# Altium PCB Vertical.PcbDoc
Units mm, origin at the board's own origin, x right, y up, seen from the top; angles counter-clockwise.
Board outline 53.95 x 47.07 mm, 2 copper layers (Top Layer, Bottom Layer), stack 1.58 mm thick; 36 components, 9 nets, 69 pads, 45 vias.
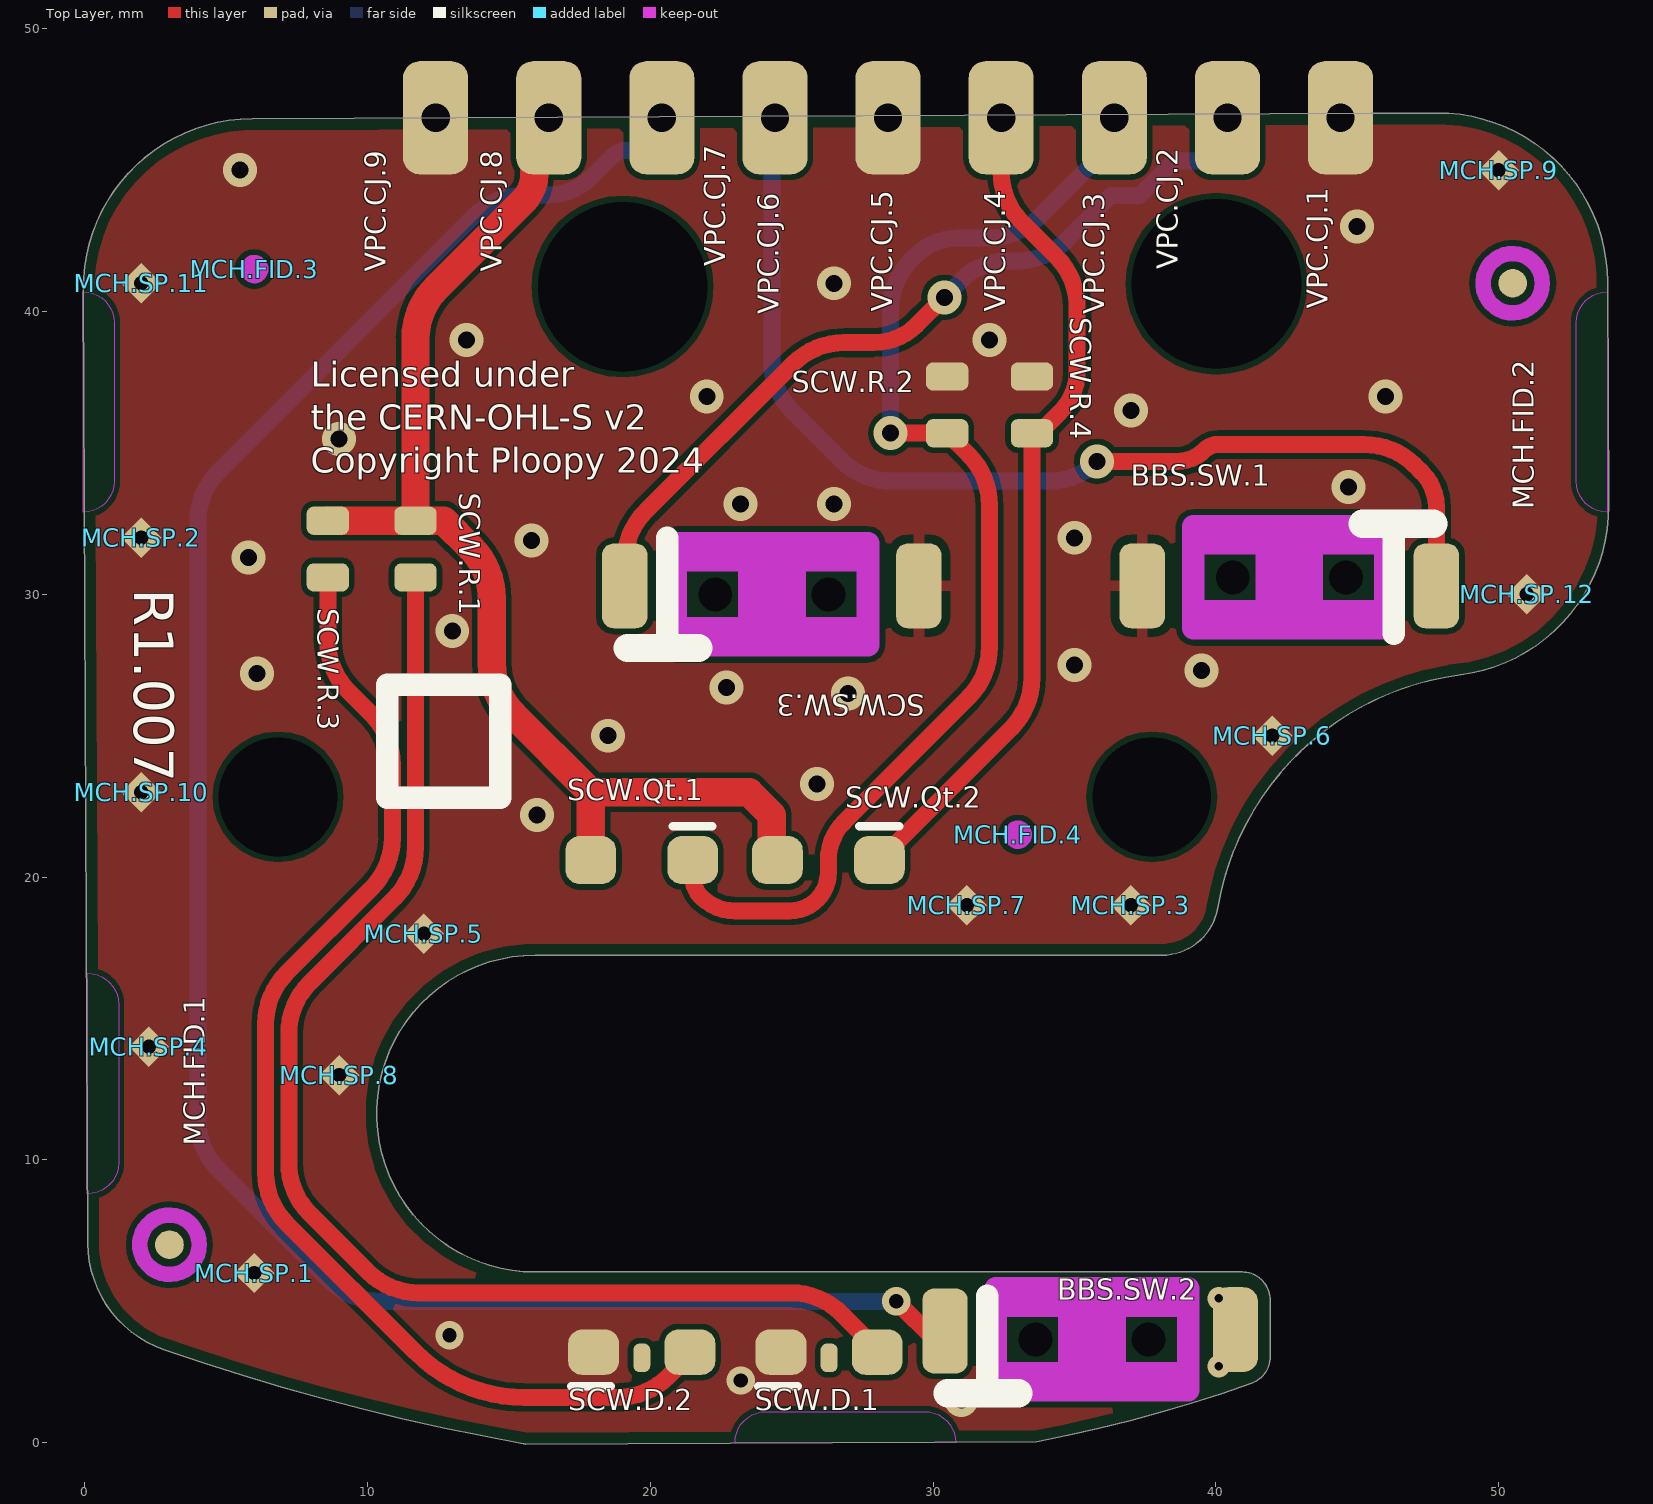
[diagram p0: Top Layer view]
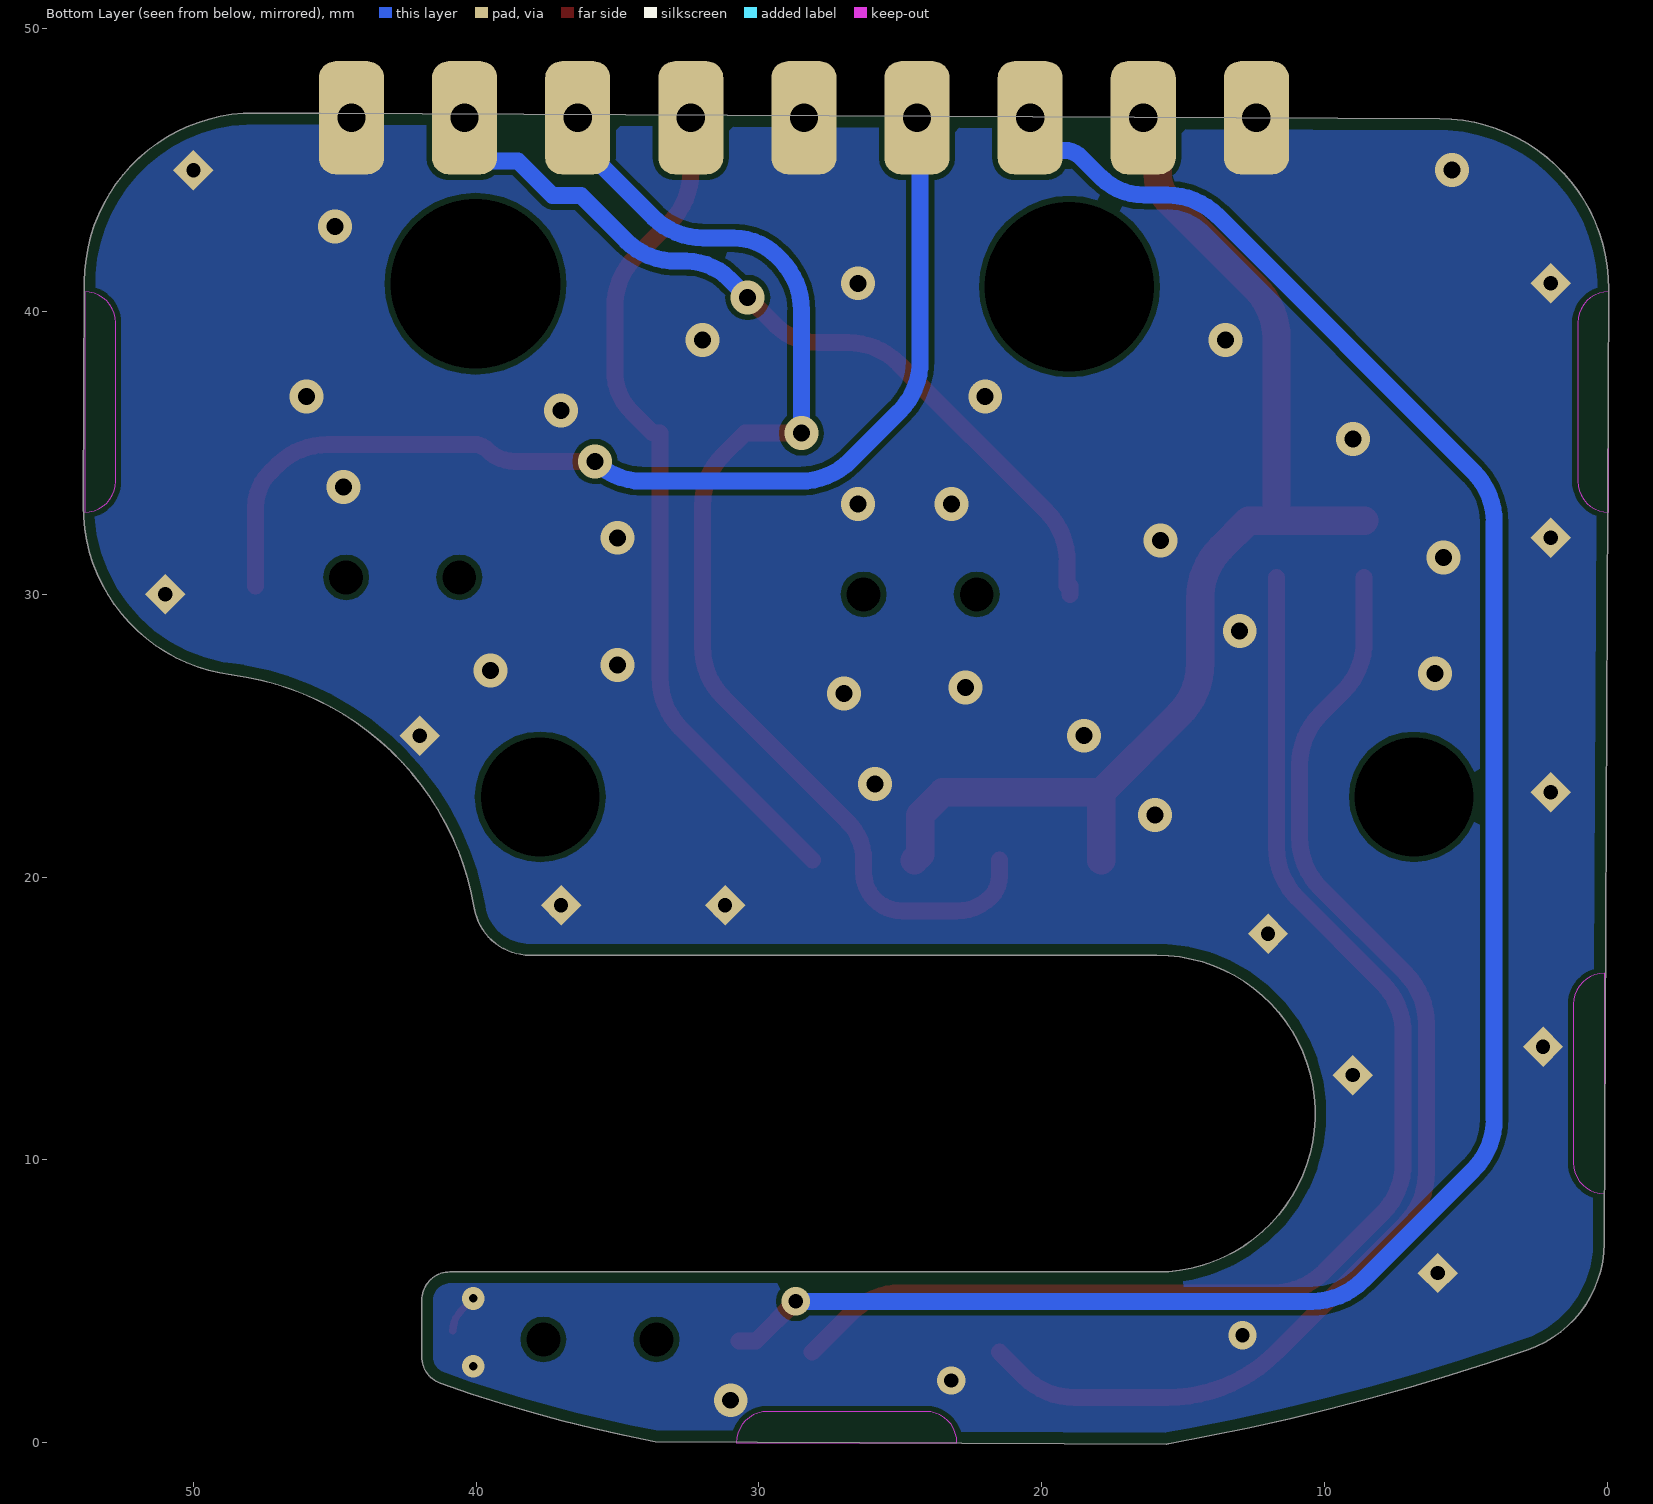
[diagram p1: Bottom Layer view, seen from below]

## Layer stack, top to bottom
Top Mask: solder mask 0.01, Solder Resist, Dk 3.5
Top Layer: signal copper 0.0356
Dielectric 4: core 1.509, Dk 4.2
Bottom Layer: signal copper 0.0356
Bottom Solder: solder mask 0.01, Solder Resist, Dk 3.5

## Board outline
2.805,3.289 ccw(c30.608,83.613) 15.509,-0.035 ccw(c24.646,50.595) 15.591,-0.05 33.666,0.037 ccw(c24.391,49.169) 41.267,2.104 ccw(c40.929,3.045) 41.929,3.045 41.929,5.037 ccw(c40.929,5.037) 40.929,6.037 15.929,6.037 cw(c15.929,11.637) 15.929,17.237 38.097,17.237 ccw(c38.097,19.237) 40.069,18.904 cw(c49.929,17.237) 48.659,27.156 ccw(c47.897,33.108) 53.897,33.137 53.858,41.05 ccw(c47.858,41.021) 47.829,47.021 45.521,47.009 5.921,46.818 ccw(c5.95,40.818) -0.05,40.789 0.113,7.049 ccw(c4.113,7.069)

## Design rules (kind name [scope] priority, off if disabled: settings)
BoardOutlineClearance [(Not HasFootprint('SPARKGAP'))] p1: gap=0.4 ignorepadtopadclearanceinfootprint=FALSE
Clearance "HighV Pads" [(InNetClass('HighV') AND (IsPad OR IsVia)) vs IsPad OR IsVia] p1: gap=0.4 ignorepadtopadclearanceinfootprint=FALSE except(0: Arc-Hole Track-Hole SMDPad-Hole THPad-Hole Via-Hole Fill-Hole Poly-Hole Region-Hole Text-Hole) // Establishes minimum clearance between bare pads that are high voltage, per IPC2221A Table 6-1, 51-100V, condition A6
Clearance Inter-Pad [IsPad vs IsPad] p2: gap=0.2 ignorepadtopadclearanceinfootprint=FALSE except(0: Arc-Hole Track-Hole SMDPad-Hole THPad-Hole Via-Hole Fill-Hole Poly-Hole Region-Hole Text-Hole)
Clearance "Spark Gaps" [InNetClass('Spark Gap') vs InNet('GND') And InPoly] p3: gap=0.635 ignorepadtopadclearanceinfootprint=FALSE except(0: Arc-Hole Track-Hole SMDPad-Hole THPad-Hole Via-Hole Fill-Hole Poly-Hole Region-Hole Text-Hole)
Clearance FIDs [Name like 'FID*'] p4: gap=1.016 ignorepadtopadclearanceinfootprint=FALSE except(0: Arc-Hole Track-Hole SMDPad-Hole THPad-Hole Via-Hole Fill-Hole Poly-Hole Region-Hole Text-Hole)
Clearance "Inner Planes" [InPoly AND OnMid] p5: gap=0.3 ignorepadtopadclearanceinfootprint=FALSE except(0: Arc-Hole Track-Hole SMDPad-Hole THPad-Hole Via-Hole Fill-Hole Poly-Hole Region-Hole Text-Hole) // Defines a larger clearance for planes on inner layers.
Clearance "All Planes" [InPoly] p6: gap=0.2 ignorepadtopadclearanceinfootprint=FALSE except(0: Arc-Hole Track-Hole SMDPad-Hole THPad-Hole Via-Hole Fill-Hole Poly-Hole Region-Hole Text-Hole) // Defines minimum clearance between planes on the same layer.
Clearance "Inner Layer Clearance" [OnMid vs OnMid] p7: gap=0.3 ignorepadtopadclearanceinfootprint=FALSE except(0: Arc-Hole Track-Hole SMDPad-Hole THPad-Hole Via-Hole Fill-Hole Poly-Hole Region-Hole Text-Hole) // We will give inner layers more spacing because they tend to be subject to stricter process limits.
Clearance [All] p8: gap=0.2 ignorepadtopadclearanceinfootprint=FALSE // 2 oz (70um) boards require at least 10mil spacing. We give a bit more to make sure things work well.
ComponentClearance "Terminal Block" [(HasFootprint('Phoenix 1933189 - Header')) vs (HasFootprint('Phoenix 1933189 - Header'))] p1: gap=-2.286 collisioncheckmode=3 verticalgap=0.254 showdistances=FALSE
ComponentClearance "FET/TP self Clearance" [(Name like 'Q*') Or (Name like 'TP*') vs (Name like 'Q*') Or (Name like 'TP*')] p2: gap=0.254 collisioncheckmode=3 verticalgap=0.254 showdistances=FALSE
ComponentClearance [Not ((Name like 'H*') Or (Name like 'FID*') Or (Name like 'SP*')) vs Not ((Name like 'H*') Or (Name like 'FID*') Or (Name like 'SP*'))] p3: gap=0.5 collisioncheckmode=3 verticalgap=0.5 showdistances=FALSE
DiffPairsRouting [All] p1: maxlimit=0.508 minlimit=0.279 mostfreqgap=0.279 toplayer_minwidth=0.279 toplayer_maxwidth=0.508 toplayer_prefwidth=0.381 bottomlayer_minwidth=0.279 bottomlayer_maxwidth=0.508 bottomlayer_prefwidth=0.381 maxuncoupledlength=12.7
Height [All] p1: minheight=0 maxheight=41 prefheight=12.7
HoleSize [All] p1: absolutevalues=TRUE maxlimit=100 minlimit=0.3 maxpercent=80.000 minpercent=20.000
HoleToHoleClearance [All] p1: gap=1.016 allowstackedmicrovias=TRUE
LayerPairs [All] p1: enforce=FALSE
MinimumSolderMaskSliver [All] p1: minsoldermaskwidth=0.09
NetAntennae [Not (HasFootprint('BALANCE_RESISTOR'))] p1: netantennaetolerance=0
PasteMaskExpansion [All] p1: expansion=-0.025
PlaneClearance [All] p1: clearance=0.4
PlaneConnect [All] p1: pad.planeconnectstyle=Relief pad.reliefexpansion=0.5 pad.reliefentries=4 pad.reliefconductorwidth=0.5 pad.reliefairgap=0.3 via.planeconnectstyle=Direct via.reliefexpansion=0.8 via.reliefentries=4 via.reliefconductorwidth=0.8 via.reliefairgap=0.3
PolygonConnect "PolygonConnect SparkGap" [HasFootprint('SparkGap')] p1: connectstyle=Direct reliefconductorwidth=0.254 reliefentries=4 polygonreliefangle="90 Angle" airgapwidth=0.254 // Ensures spark gaps get a direct connection to plane.
PolygonConnect PolygonConnect_GND [All vs InNet('GND')] p2: connectstyle=Direct reliefconductorwidth=0.5 reliefentries=4 polygonreliefangle="90 Angle" airgapwidth=0.3 // This rule specifies all vias and holes connected to a GND plane have direct connections.
PolygonConnect [All] p3: connectstyle=Direct reliefconductorwidth=0.5 reliefentries=4 polygonreliefangle="90 Angle" airgapwidth=0.25
RoutingVias [All] p1: holewidth=0.5 width=1 viastyle="Through Hole" minholewidth=0.2 minwidth=0.5 maxholewidth=5.08 maxwidth=6.35
ShortCircuit [Not (InPadClass('TraceResistorPads')) vs Not (InPadClass('TraceResistorPads'))] p1: allowed=FALSE
SilkToBoardRegionClearance [All] p1 off:
SilkToSilkClearance [All] p1 off: silktosilkclearance=0.254
SilkToSolderMaskClearance SilkscreenOverComponentPads [IsPad] p1: minsilkscreentomaskgap=0.102 clearancetoexposedcopper=FALSE
SolderMaskExpansion [All] p1: expansion=0.076 istentingtop=FALSE
Width [All] p1: maxlimit=50.8 minlimit=0.26 preferedwidth=0.4 minimp=50.000000 maximp=50.000000 favimp=50.000000
15 further rules are at their usual default settings.

## Classes and differential pairs
component class VPC: VPC.CJ.1 VPC.CJ.2 VPC.CJ.3 VPC.CJ.4 VPC.CJ.5 VPC.CJ.6 VPC.CJ.7 VPC.CJ.8 VPC.CJ.9
component class SCW: SCW.D.1 SCW.D.2 SCW.Qt.1 SCW.Qt.2 SCW.R.1 SCW.R.2 SCW.R.3 SCW.R.4 SCW.SW.3
component class BBS: BBS.SW.1 BBS.SW.2
component class MCH: MCH.FID.1 MCH.FID.2 MCH.FID.3 MCH.FID.4 MCH.SP.1 MCH.SP.2 MCH.SP.3 MCH.SP.4 MCH.SP.5 MCH.SP.6 MCH.SP.7 MCH.SP.8 MCH.SP.9 MCH.SP.10 MCH.SP.11 MCH.SP.12

## Components (designator, comment, footprint, x,y, rotation, side; value= is the part's Value field where it differs from the comment)
BBS.SW.1 "D2LS-21" D2LS-21#1 42.6,30.6 r180 top (schematic designator SW1)
BBS.SW.2 "D2LS-21" D2LS-21#2 35.625,3.65 r0 top (schematic designator SW2)
MCH.FID.1 "IPC-7351 Fiducial 1mm" FIDUCIAL_1.5 3,7 r90 top (schematic designator FID1)
MCH.FID.2 "IPC-7351 Fiducial 1mm" FIDUCIAL_1.5 50.5,41 r90 top (schematic designator FID2)
MCH.FID.3 "1mm Fiducial for OpenPNP" FIDUCIAL-NEW 6,41.5 r90 top (schematic designator FID3)
MCH.FID.4 "1mm Fiducial for OpenPNP" FIDUCIAL-NEW 33,21.5 r90 top (schematic designator FID4)
MCH.SP.1 "Spark Gap" SparkGap 6,6 r90 top (schematic designator SP1)
MCH.SP.2 "Spark Gap" SparkGap 2,32 r90 top (schematic designator SP2)
MCH.SP.3 "Spark Gap" SparkGap 37,19 r90 top (schematic designator SP3)
MCH.SP.4 "Spark Gap" SparkGap 2.275,14 r90 top (schematic designator SP4)
MCH.SP.5 "Spark Gap" SparkGap 12,18 r90 top (schematic designator SP5)
MCH.SP.6 "Spark Gap" SparkGap 42,25 r90 top (schematic designator SP6)
MCH.SP.7 "Spark Gap" SparkGap 31.2,19 r90 top (schematic designator SP7)
MCH.SP.8 "Spark Gap" SparkGap 9,13 r90 top (schematic designator SP8)
MCH.SP.9 "Spark Gap" SparkGap 50,45 r90 top (schematic designator SP9)
MCH.SP.10 "Spark Gap" SparkGap 2,23 r90 top (schematic designator SP10)
MCH.SP.11 "Spark Gap" SparkGap 2,41 r90 top (schematic designator SP11)
MCH.SP.12 "Spark Gap" SparkGap 51,30 r90 top (schematic designator SP12)
SCW.D.1 "IR12-21C/TR8 or VSMB10940" IR12-21C/TR8 26.325,3.2 r270 top (schematic designator D1)
SCW.D.2 "IR12-21C/TR8 or VSMB10940" IR12-21C/TR8 19.7,3.2 r270 top (schematic designator D2)
SCW.Qt.1 "PT26-51B/TR8 or PT12-21B/TR8" PT26-51B/TR8 19.7,20.6 r90 top (schematic designator Qt1)
SCW.Qt.2 "PT26-51B/TR8 or PT12-21B/TR8" PT26-51B/TR8 26.3,20.6 r90 top (schematic designator Qt2)
SCW.R.1 "0805" 0805 11.7,31.6 r180 top value="100R 1%" (schematic designator R1)
SCW.R.2 "0805" 0805 30.5,36.7 r0 top value="1k 1%" (schematic designator R2)
SCW.R.3 "0805" 0805 8.6,31.6 r180 top value="100R 1%" (schematic designator R3)
SCW.R.4 "0805" 0805 33.5,36.7 r0 top value="1k 1%" (schematic designator R4)
SCW.SW.3 "D2LS-21" D2LS-21#1 24.3,30 r0 top (schematic designator SW3)
VPC.CJ.1 "PCBJointCastellationJoint" PCBJoint 44.411,46.851 r0 top (schematic designator CJ1)
VPC.CJ.2 "PCBJointCastellationJoint" PCBJoint 40.411,46.851 r0 top (schematic designator CJ2)
VPC.CJ.3 "PCBJointCastellationJoint" PCBJoint 36.411,46.851 r0 top (schematic designator CJ3)
VPC.CJ.4 "PCBJointCastellationJoint" PCBJoint 32.411,46.851 r0 top (schematic designator CJ4)
VPC.CJ.5 "PCBJointCastellationJoint" PCBJoint 28.411,46.851 r0 top (schematic designator CJ5)
VPC.CJ.6 "PCBJointCastellationJoint" PCBJoint 24.411,46.851 r0 top (schematic designator CJ6)
VPC.CJ.7 "PCBJointCastellationJoint" PCBJoint 20.411,46.851 r0 top (schematic designator CJ7)
VPC.CJ.8 "PCBJointCastellationJoint" PCBJoint 16.411,46.851 r0 top (schematic designator CJ8)
VPC.CJ.9 "PCBJointCastellationJoint" PCBJoint 12.411,46.851 r0 top (schematic designator CJ9)

## Footprints (in the part's own frame and the unit in brackets; to place one, negate y for a bottom-side part, rotate by r counter-clockwise, add the part's x,y. Pads: shape width x height; smd on the part's side, far side on the other; paste and mask are expansions set on the pad)
0805 [mm] "Chip Capacitor, 2-Leads, Body 2.0x1.3mm, IPC Medium Density"
  rrect50% 1.5x1 smd paste+0: 1(0,1.002) 2(0,-1.002)
  body extent -0.72,-1.1 0.72,1.1, height 0.8
D2LS-21#1 [mm]
  rrect50% 1.6x3 smd paste-0.04: A(-5.2,0.3) B(5.2,0.3)
  round 0 hole 1.2 unplated: ""(-2,0) ""(2,0)
  Top Layer keep-out lines w0.8: 3.4,1.2 -3.4,1.2 ; 3.4,-1.2 -3.4,-1.2 ; 0.8,1.8 0.8,-1.7 ; 0,1.8 0,-1.7 ; -0.8,1.8 -0.8,-1.8 ; 3.4,1.8 -3.4,1.8 -3.4,-1.8 3.4,-1.8 3.4,1.8
  silkscreen extent -5.1,-2 -2.6,2, body extent -5.6,-2.4 5.6,2.4, height 3.19
D2LS-21#2 [mm]
  rrect50% 1.6x3 smd paste-0.04: A(-5.2,0.3)
  rrect65% 1.6x3 smd paste-0.04: B(5.075,0.35)
  round 0 hole 1.2 unplated: ""(-2,0) ""(2,0)
  Top Layer keep-out lines w0.8: -3.4,-1.2 3.4,-1.2 ; -3.4,1.2 3.4,1.2 ; -0.8,-1.8 -0.8,1.8 ; 0,-1.7 0,1.8 ; 0.8,-1.7 0.8,1.8 ; -3.4,-1.8 3.4,-1.8 3.4,1.8 -3.4,1.8 -3.4,-1.8
  silkscreen extent -5.1,-2 -2.6,1.55, body extent -5.6,-2.4 5.6,2.4, height 3.19
FIDUCIAL-NEW [mm]
  Top Layer keep-out circle w0.6: c0,0 r0.2
FIDUCIAL_1.5 [mil]
  round 40 smd paste-60 mask+30: 1(0,0)
  Top Layer keep-out circle w21.65: c0,0 r41.34
IR12-21C/TR8 [mm]
  rrect60% 1.6x1.8 smd paste-0.03: A(0,1.702) C(0,-1.702)
  rrect70% 1x0.6 smd paste-99: ""(0.2,0.002)
  silkscreen extent 1.2,-2.5 1.2,-1.1, body extent -2.29,-1.5 0.2,1.5, height 1
PCBJoint [mm]
  rrect50% 2.3x4 hole 1 paste-99: 1(0,0)
PT26-51B/TR8 [mm]
  rrect60% 1.7x1.8 smd paste-0.03: C(0,1.802) E(0,-1.802)
  silkscreen extent 1.2,-2.5 1.2,-1.1, body extent -2.05,-1.6 0.45,1.6, height 1.6
SparkGap [mil]
  rect 40x40 smd rot 45 paste-99 mask+4: 1(0,0)
  rect 40x40 smd far side rot 45 paste-99 mask+4: 1(0,0)

## Part data
BBS.SW.1 BBS.SW.2 SCW.SW.3: "Compact Surface-mounting Switch for long durability", Supplier Part Number 1=Z4378CT-ND, Supplier 1=Digi-Key, Supplier 2=Mouser, Supplier Part Number 2=653-D2LS-21
MCH.FID.1 MCH.FID.2: library part FIDUCIAL_1.5, PNP-A=1, PNP-da=0, PNP-dx=0, PNP-dy=0, PNP-FeedType=Fiducial, PNP-Level=1, PNP-Lv=1, PNP-Nzl=2, PNP-PlacePriority=0, PNP-Pt=0, PNP-TapeIndex=0, PNP-TapeWidth=0, PNP-Thk=1.02, PNP-TS=70, PNP-Type=MARK1, PNP-Voff=0, PNP-W=0, PNP-X=4, PNP-Y=4
MCH.FID.3 MCH.FID.4: library part FIDUCIAL_NEW, "This fiducial is designed to work with OpenPNP. It presents a circular pattern under the solder mask, to prevent glare issues from messing with the detection.", PNP-A=1, PNP-da=0, PNP-dx=0, PNP-dy=0, PNP-FeedType=Fiducial, PNP-Level=1, PNP-Lv=1, PNP-Nzl=2, PNP-PlacePriority=0, PNP-Pt=0, PNP-TapeIndex=0, PNP-TapeWidth=0, PNP-Thk=1.02, PNP-TS=70, PNP-Type=MARK1, PNP-Voff=0, PNP-W=0, PNP-X=4, PNP-Y=4
MCH.SP.1 MCH.SP.2 MCH.SP.3 MCH.SP.4 MCH.SP.5 MCH.SP.6 MCH.SP.7 MCH.SP.8 MCH.SP.9 MCH.SP.10 MCH.SP.11 MCH.SP.12: "Open square pad for spark gapping"
SCW.D.1 SCW.D.2: library part IR12-21C/TR8, "Infrared (IR) Emitter 880nm 1.3V 50mA 1mW/sr @ 20mA 30° 2-SMD, No Lead", Supplier Part Number 1=1080-1351-1-ND, Supplier 1=Digi-Key, Supplier 2=Mouser, Supplier 3=Digi-Key, Supplier 4=Mouser, Supplier 5=Arrow, Supplier Part Number 2=638-IR12-21C, Supplier Part Number 3=VSMB10940CT-ND, Supplier Part Number 4=78-VSMB10940, Supplier Part Number 5=VSMB10940
SCW.Qt.1 SCW.Qt.2: library part PT26-51B/TR8, "Phototransistor 940nm Side View 1206 (3216 Metric)", Supplier Part Number 1=1080-1387-1-ND, Supplier 1=Digi-Key, Supplier 2=Digi-Key, Supplier Part Number 2=1080-1377-1-ND
SCW.R.1 SCW.R.3: library part "Res 100R 1% 0805", "Chip resistor", Supplier Part Number 1=RMCF0805FT100RCT-ND, Supplier 1=Digi-Key, Supplier 2=Digi-Key, Supplier Part Number 2=RMCF0805FT100RTR-ND
SCW.R.2 SCW.R.4: library part "Res 1k 1% 0805", "Chip resistor, 1/8W 100PPM", Supplier Part Number 1=RMCF0805FT1K00TR-ND, Supplier 1=Digi-Key
VPC.CJ.1 VPC.CJ.2 VPC.CJ.3 VPC.CJ.4 VPC.CJ.5 VPC.CJ.6 VPC.CJ.7 VPC.CJ.8 VPC.CJ.9: library part PCBJoint, "Pad for soldering a castellated PCB edge. Easy way to join two PCBs together."

## Free pads (board coordinates)
  round 0 hole 4.2: ""(6.838,22.837) ""(37.738,22.837)
  round 0 hole 6: ""(19.023,40.881) ""(40.023,40.983)

## Via types
v1: diameter 1.2, hole 0.6, Top Layer to Bottom Layer, tented both sides, 28 vias
v2: diameter 1.016, hole 0.508, Top Layer to Bottom Layer, 12 vias
v3: diameter 1, hole 0.5, Top Layer to Bottom Layer, tented both sides, 3 vias
v4: diameter 0.8, hole 0.3, Top Layer to Bottom Layer, tented both sides, 2 vias

## Nets (pads, with @x,y where several pads share a name; then routed paths per layer and width w, separated by ;. In a path a pad name is that pad's centre, name@x,y a point inside that pad or via, vN(x,y) a via of type N, cw(c..) or ccw(c..) an arc to the next point about the centre after c; other vN are vias at no path point)
3V3: SCW.Qt.1.C SCW.Qt.2.C SCW.R.1.2 SCW.R.3.2 VPC.CJ.8.1 | length 41.4
  Top Layer w1: SCW.R.3.2 SCW.R.1.2 ; VPC.CJ.8.1@16.411,45.556 16.099,45.556 15.9,45.357 15.9,44.829 cw(c14.624,44.829) 15.526,43.926 12.444,40.844 ccw(c14.24,39.048) 11.7,39.048 SCW.R.1.2 ; SCW.Qt.1.C 17.898,23.002 ; SCW.Qt.2.C 24.3,20.798 24.3,22.2 23.498,23.002 17.898,23.002 ; SCW.R.1.2 12.698,32.602 13.656,31.644 cw(c11.86,29.848) 14.4,29.848 14.4,27.552 ccw(c16.94,27.552) 15.144,25.756 17.898,23.002
GND: BBS.SW.1.B BBS.SW.2.B MCH.SP.1.1 MCH.SP.2.1 MCH.SP.3.1 MCH.SP.4.1 MCH.SP.5.1 MCH.SP.6.1 MCH.SP.7.1 MCH.SP.8.1 MCH.SP.9.1 MCH.SP.10.1 MCH.SP.11.1 MCH.SP.12.1 SCW.D.1.C SCW.D.2.C SCW.R.2.1 SCW.R.4.1 SCW.SW.3.B VPC.CJ.1.1 VPC.CJ.5.1 VPC.CJ.9.1 | length 1.4
  Top Layer w0.26: v4(40.1,5.1) 40.524,4.676 cw(c39.799,3.95) BBS.SW.2.B@40.825,3.95
  other v1: 31,1.5 16,22.2 25.9,23.3 18.5,25 27,26.5 22.7,26.7 6.1,27.2 39.5,27.3 35,27.5 13,28.7 5.8,31.3 15.8,31.9 35,32 23.2,33.2 26.5,33.2 44.7,33.8 9,35.5 37,36.5 22,37 46,37 13.5,39 32,39 26.5,41 45,43 5.5,45
  other v2: 6,6 9,13 2.275,14 12,18 31.2,19 37,19 2,23 42,25 51,30 2,32 2,41 50,45
  other v3: 23.2,2.2 12.9,3.8
  other v4: 40.1,2.7
NetBBS.SW.1_A: BBS.SW.1.A VPC.CJ.6.1 | length 37.5
  Top Layer w0.6: v1(35.8,34.7) 38.634,34.7 ccw(c38.634,36.066) 39.6,35.1 cw(c40.083,34.617) 40.083,35.3 45.248,35.3 cw(c45.248,32.76) 47.044,34.556 47.3,34.3 cw(c46.093,33.093) 47.8,33.093 BBS.SW.1.A
  Bottom Layer w0.6: VPC.CJ.6.1@24.411,45.794 24.3,45.683 24.3,38.252 ccw(c26.84,38.252) 25.044,36.456 26.756,34.744 ccw(c28.552,36.54) 28.552,34 34.11,34 ccw(c34.11,36.39) v1(35.8,34.7)
NetBBS.SW.2_A: BBS.SW.2.A VPC.CJ.7.1 | length 73.6
  Top Layer w0.6: v3(28.7,5) 30.1,3.6 BBS.SW.2.A@30.7,3.6
  Bottom Layer w0.6: VPC.CJ.7.1@20.411,45.775 20.337,45.7 19.2,45.7 ccw(c19.2,44.888) 18.626,45.462 17.922,44.759 cw(c16.378,46.3) 16.376,44.118 15.57,44.118 ccw(c15.57,41.578) 13.774,43.374 4.744,34.344 ccw(c6.54,32.548) 4,32.548 4,11.442 ccw(c6.54,11.442) 4.744,9.646 8.646,5.744 ccw(c10.442,7.54) 10.442,5 v3(28.7,5)
NetSCW.D.1_A: SCW.D.1.A SCW.R.1.1 | length 46.3
  Top Layer w0.6: SCW.R.1.1 11.7,21.052 cw(c9.16,21.052) 10.956,19.256 7.964,16.264 ccw(c9.76,14.468) 7.22,14.468 7.22,9.892 ccw(c9.76,9.892) 7.964,8.096 10.016,6.044 ccw(c11.812,7.84) 11.812,5.3 24.975,5.3 cw(c24.975,2.76) 26.771,4.556 SCW.D.1.A@28.127,3.2
NetSCW.D.2_A: SCW.D.2.A SCW.R.3.1 | length 42.6
  Top Layer w0.6: SCW.R.3.1 8.6,28.352 ccw(c11.14,28.352) 9.344,26.556 10.136,25.764 cw(c8.34,23.968) 10.88,23.968 10.88,21.392 cw(c8.34,21.392) 10.136,19.596 7.144,16.604 ccw(c8.94,14.808) 6.4,14.808 6.4,9.552 ccw(c8.94,9.552) 7.144,7.756 11.709,3.191 ccw(c15.55,7.033) 15.55,1.6 18.834,1.6 ccw(c18.834,4.173) 20.654,2.354 21.5,3.2 SCW.D.2.A@21.502,3.2
NetSCW.Qt.1_E: SCW.Qt.1.E SCW.R.2.2 VPC.CJ.3.1 | length 42
  Top Layer w0.6: SCW.Qt.1.E 21.502,20.018 ccw(c22.518,20.018) 21.8,19.3 ccw(c23.007,20.507) 23.007,18.8 24.934,18.8 ccw(c24.934,20.166) 25.899,19.199 ; 25.901,19.201 ccw(c24.934,20.166) 26.3,20.166 26.3,20.6 cw(c28.231,20.6) 26.865,21.965 ; 26.866,21.966 31.256,26.356 ccw(c29.46,28.152) 32,28.152 32,33.145 ccw(c29.46,33.145) 31.256,34.942 SCW.R.2.2 28.602,35.698 28.6,35.7 v1(28.5,35.7)
  Bottom Layer w0.6: v1(28.5,35.7) 28.5,40.048 cw(c31.04,40.048) 29.244,41.844 29.364,41.964 cw(c30.9,40.427) 30.9,42.6 31.958,42.6 ccw(c31.958,45.14) 33.754,43.344 36.262,45.852 VPC.CJ.3.1@36.411,45.852
NetSCW.Qt.2_E: SCW.Qt.2.E SCW.R.4.2 VPC.CJ.4.1 | length 28.9
  Top Layer w0.6: SCW.Qt.2.E 32.756,25.254 ccw(c30.96,27.05) 33.5,27.05 SCW.R.4.2 33.75,35.698 34.5,36.448 ccw(c33.051,37.896) 35.1,37.896 35.1,40.148 ccw(c32.56,40.148) 34.356,41.944 33.155,43.145 cw(c34.951,44.941) 32.411,44.941 VPC.CJ.4.1@32.411,45.8
NetSCW.SW.3_A: SCW.SW.3.A VPC.CJ.2.1 | length 28.7
  Top Layer w0.6: SCW.SW.3.A@19,30 SCW.SW.3.A@19,30.3 ; SCW.SW.3.A 19.1,31.148 cw(c21.64,31.148) 19.844,32.944 25.056,38.156 cw(c26.852,36.36) 26.852,38.9 27.9,38.9 ccw(c27.9,41.073) 29.436,39.536 v1(30.4,40.5)
  Bottom Layer w0.6: v1(30.4,40.5) 31.04,41.14 cw(c32.585,39.595) 32.585,41.78 33.01,41.78 ccw(c33.01,42.6) 33.108,41.786 cw(c33.178,41.19) 33.129,41.788 ccw(c32.928,44.32) 34.724,42.524 36.3,44.1 37.3,44.1 38.521,45.321 39.861,45.321 VPC.CJ.2.1@40.411,45.871
pads on no net: BBS.SW.1. BBS.SW.2. MCH.FID.1.1 MCH.FID.2.1 SCW.D.1. SCW.D.2. SCW.SW.3.

## Polygon pours and split planes (outlines as drawn)
GND on Bottom Layer "Bottom Layer-GND" (solid, remove dead copper, pour order 0): -1,-1 55,-1 55,49 -1,49
GND on Top Layer "Top Layer-GND" (solid, remove dead copper, pour order 2): -1,-1 55,-1 55,49 -1,49

## Keep-outs
Keep-Out Layer:
  region: 29.7,1.1 cw(c29.7,0) 30.8,0 23,0 cw(c24.1,0) 24.1,1.1
  region: 1.2,9.9 cw(c0.1,9.9) 0.1,8.8 0.1,16.6 cw(c0.1,15.5) 1.2,15.5
  region: 52.75,39.6 cw(c53.85,39.6) 53.85,40.7 53.85,32.9 cw(c53.85,34) 52.75,34
  region: 1.05,34 cw(c-0.05,34) -0.05,32.9 -0.05,40.7 cw(c-0.05,39.6) 1.05,39.6

## Silkscreen, mask and mechanical layers (free items; w line width, h text height)
Top Overlay:
  lines w0.8: 10.7,22.8 10.7,26.8 14.7,26.8 14.7,22.8 10.7,22.8
  text "Licensed under  / the CERN-OHL-S v2  / Copyright Ploopy 2024" at 8,34 h1.52
  text "R1.007" at 1.3,30.2 h2.4 r270
Mechanical 1:
  circle w0.1: c37.629,3.637 r1.2
Board Outline:
  lines w0.2: 1.879,4.679 ccw(c30.608,83.613) 10.287,2.108 cw(c10.041,1.12) 11.044,1.291 ; -0.05,40.789 cw(c5.95,40.818) 5.921,46.818 45.521,47.009 47.829,47.021 cw(c47.858,41.021) 53.858,41.05 53.897,33.137 cw(c47.897,33.108) 48.659,27.156 ccw(c49.929,17.237) 40.069,18.904 cw(c38.097,19.237) 38.097,17.237 15.929,17.237 ccw(c15.929,11.637) 15.929,6.037 40.929,6.037 cw(c40.929,5.037) 41.929,5.037 41.929,3.045 cw(c40.929,3.045) 41.267,2.104 cw(c24.391,49.17) 33.666,0.037 15.591,-0.05 cw(c24.39,49.169) 15.509,-0.035 cw(c30.608,83.613) 2.805,3.289 cw(c4.113,7.069) 0.113,7.049 -0.05,40.789